# EAGLE board Circuit (EAGLE 5.00)
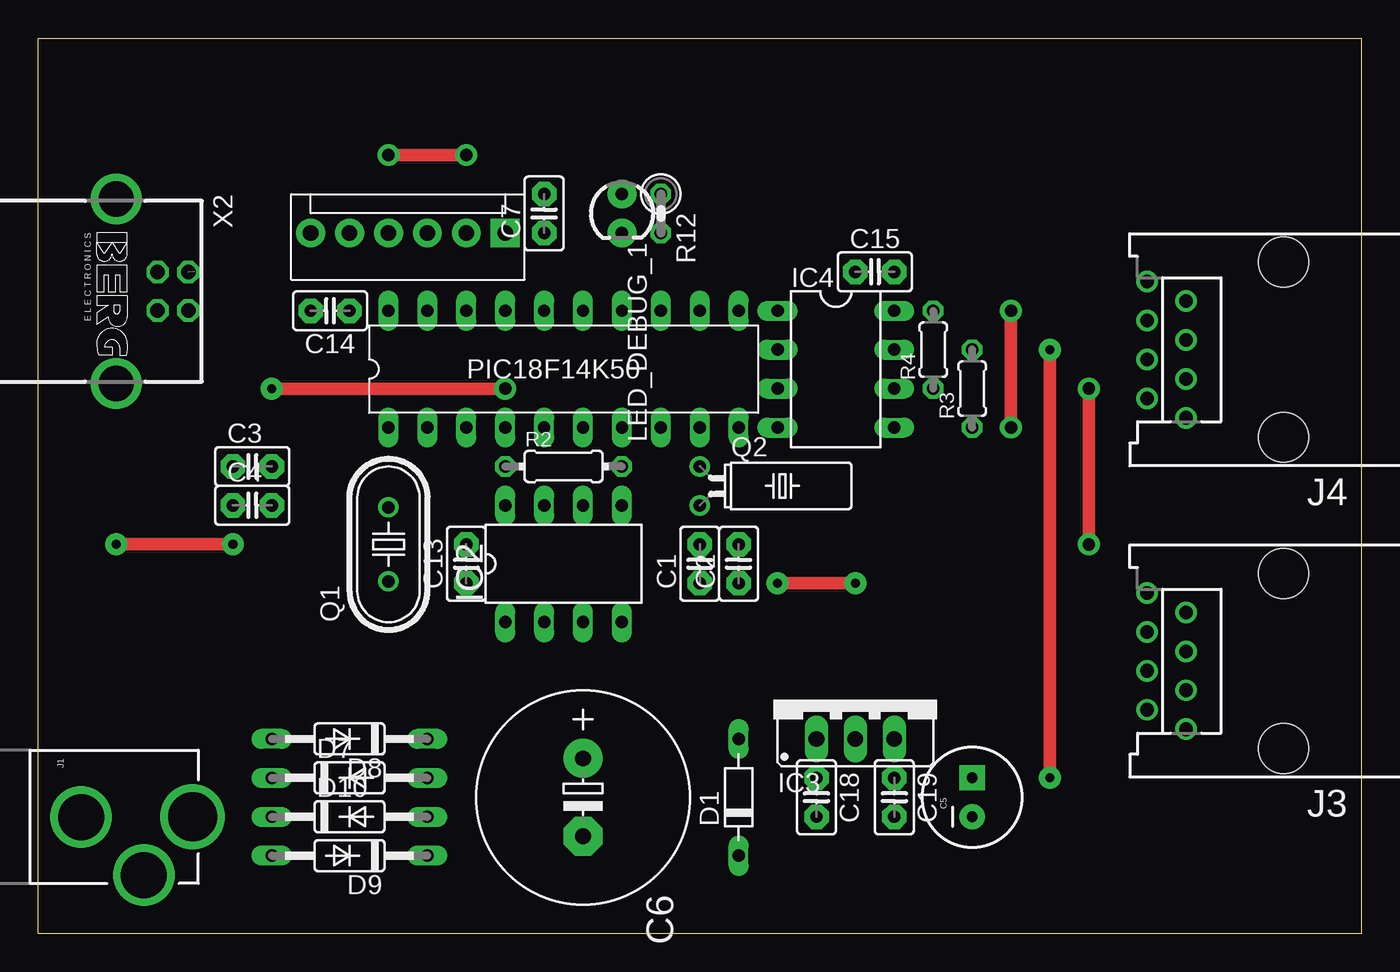
[diagram p0: board, top side]
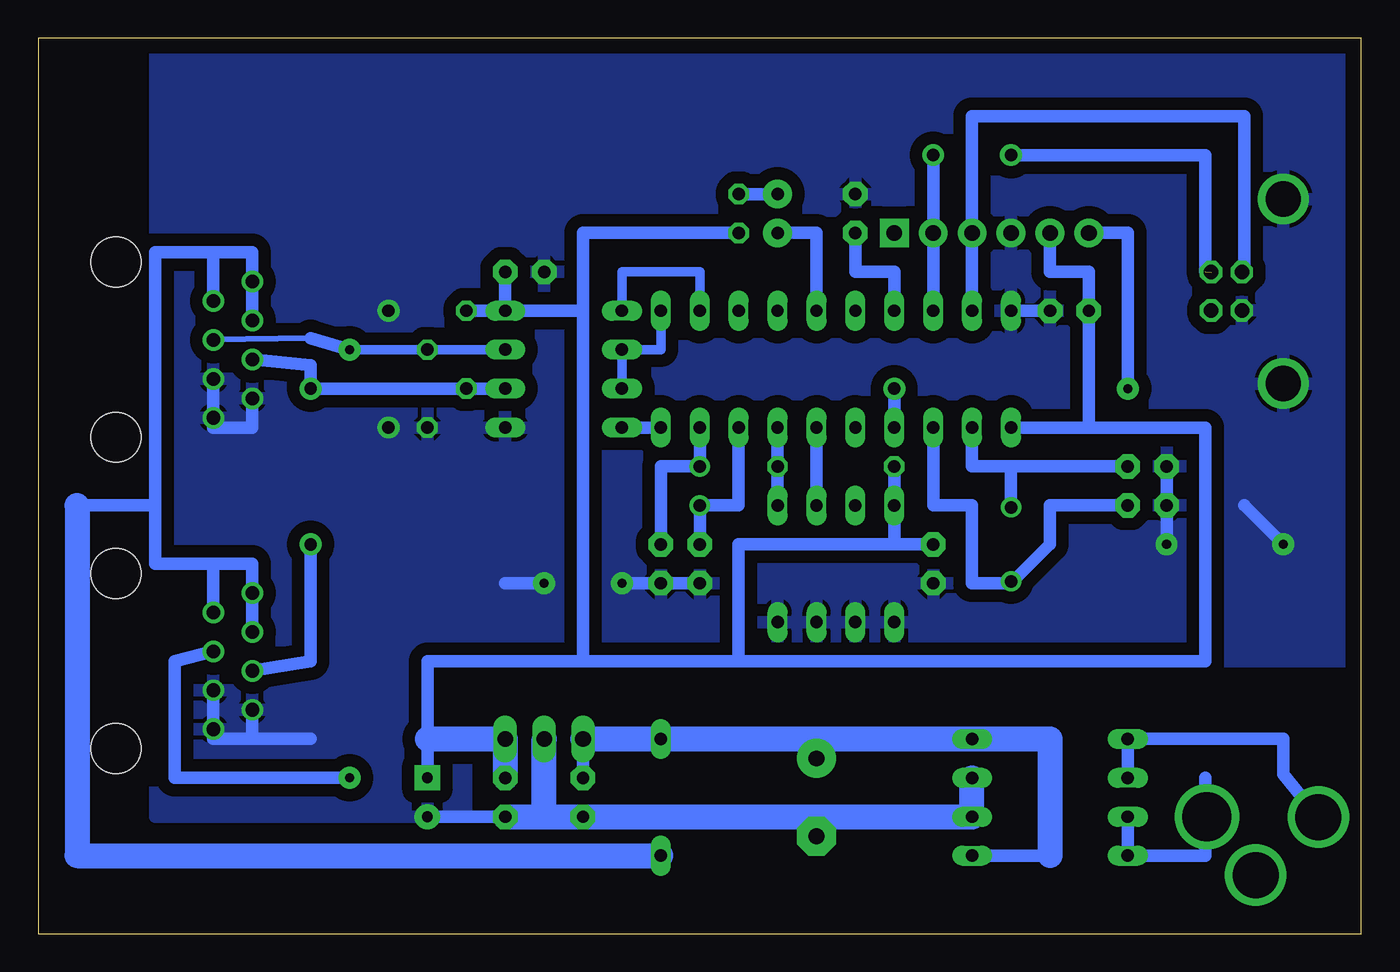
[diagram p1: board, bottom side, seen from below]

Size 86.36 x 58.42 mm. Coordinates in mm from the lower left corner, seen from the top.
Outline: 86.36,0 0,0 0,58.42 86.36,58.42 86.36,0
Copper layers (1*16): Top 0.035mm / dielectric 1.5mm / Bottom 0.035mm
Design rules "default": minimum track width 10mil, minimum drill 24mil, track to track 8mil, track to pad 8mil, pad to pad 8mil, via to via 8mil, smd to smd 8mil, copper to edge 40mil, drill to drill 8mil, minimum pad ring 10mil, minimum via ring 8mil, stop-mask expansion 4mil, vias tented up to drill 0mil, thermal gap 10mil

## Footprints (pad centres in the part's own frame; a part is rotated, then mirrored left to right if it is on the bottom)
C2.5-2 = drill 0.813 pad 1.6 octagon: 1 -1.27,0; 2 1.27,0
CPOL-RADIAL-100UF-25V = drill 0.7 pad 1.651 square: 1 1.27,0 | drill 0.7 pad 1.651 round: 2 -1.27,0
E5-13 = drill 1.016 pad 2.54 round: + -2.54,0 | drill 1.016 pad 2.54 octagon: - 2.54,0
D-7.5 = drill 0.813 long: A 3.81,0; C -3.81,0
DO35-10 = drill 0.813 long: A 5.08,0; C -5.08,0
DIL8 = drill 0.813 long: 1 -3.81,-3.81; 2 -1.27,-3.81; 3 1.27,-3.81; 4 3.81,-3.81; 5 3.81,3.81; 6 1.27,3.81; 7 -1.27,3.81; 8 -3.81,3.81
78XXS = drill 1.016 long: GND 0,-2.54; IN -2.54,-2.54; OUT 2.54,-2.54
DIL08 = drill 0.813 long: 1 -3.81,-3.81; 2 -1.27,-3.81; 3 1.27,-3.81; 4 3.81,-3.81; 5 3.81,3.81; 6 1.27,3.81; 7 -1.27,3.81; 8 -3.81,3.81
POWER_JACK_PTH_LOCK = drill 2.997 round: GND 0.025,6.608; GNDBREAK 3.812,10.7 | drill 3.2 round: PWR 0,13.878
215877-4 = drill 0.889 round: 1 -4.445,6.35; 2 -3.175,8.89; 3 -1.905,6.35; 4 -0.635,8.89; 5 0.635,6.35; 6 1.905,8.89; 7 3.175,6.35; 8 4.445,8.89 | hole 3.251: -5.715,0; 5.715,0
LED3MM = drill 0.813 pad 1.88 round: A -1.27,0; K 1.27,0
HC49U70 = drill 0.813 round: 1 -2.413,0; 2 2.413,0
TC38H = drill 0.813 round: 1 -1.27,0; 2 1.27,0
0204/7 = drill 0.813 octagon: 1 -3.81,0; 2 3.81,0
0204/5 = drill 0.813 octagon: 1 -2.54,0; 2 2.54,0
0207/2V = drill 0.813 octagon: 1 -1.27,0; 2 1.27,0
E.18F14K50 = drill 0.8 long: RA0/D+/PGD -7.62,3.81; RA1/D-/PGC -5.08,3.81; RA3/MCLR/VPP -2.54,-3.81; RA4/AN3/OSC2/CLKOUT -5.08,-3.81; RA5/OSC1/CLKIN -7.62,-3.81; RB4/AN10/SDI/SDA 7.62,3.81; RB5/AN11/RX/DT 10.16,3.81; RB6/SCK/SCL 12.7,3.81; RB7/TX/CK 12.7,-3.81; RC0/AN4/C12IN+/INT0/VREF+ 0,3.81; RC1/AN5/C12IN1-/INT1/VREF 2.54,3.81; RC2/AN6/P1D/C12IN2-/CVREF/INT2 5.08,3.81; RC3/AN7/P1C/C12IN3-/PGM 5.08,-3.81; RC4/P1B/C12OUT/SRQ 2.54,-3.81; RC5/CCP1/P1A/T0CKI 0,-3.81; RC6/AN8/SS/T13CKI/T1OSCI 7.62,-3.81; RC7/AN9/SDO/T1OSCO 10.16,-3.81; VDD -10.16,-3.81; VSS -10.16,3.81; VUSB -2.54,3.81
MOLEX-1X6 = drill 1.016 pad 1.88 square: 1 0,0 | drill 1.016 pad 1.88 round: 2 2.54,0; 3 5.08,0; 4 7.62,0; 5 10.16,0; 6 12.7,0
PN61729-S = drill 0.95 octagon: 1 1.25,4.71; 2 -1.25,4.71; 3 -1.25,2.71; 4 1.25,2.71 | drill 2.3 pad 2.9 round: S1 -6.02,0; S2 6.02,0

## Placement (x,y rotation side)
C1  22pf  [C2.5-2]  43.18,24.13 90 top
C2  22pf  [C2.5-2]  45.72,24.13 90 top
C3  22pf  [C2.5-2]  13.97,30.48 0 top
C4  22pf  [C2.5-2]  13.97,27.94 0 top
C5  10uf  [CPOL-RADIAL-100UF-25V]  60.96,8.89 90 top
C6  2200uf  [E5-13]  35.56,8.89 270 top
C7  100nf  [C2.5-2]  33.02,46.99 90 top
C13  10nf  [C2.5-2]  27.94,24.13 90 top
C14  10nf  [C2.5-2]  19.05,40.64 180 top
C15  10nf  [C2.5-2]  54.61,43.18 0 top
C18  100nf  [C2.5-2]  50.8,8.89 270 top
C19  100nf  [C2.5-2]  55.88,8.89 270 top
D1  [D-7.5]  45.72,8.89 90 top
D7  BA243A  [DO35-10]  20.32,10.16 0 top
D8  BA243A  [DO35-10]  20.32,12.7 180 top
D9  BA243A  [DO35-10]  20.32,5.08 180 top
D10  BA243A  [DO35-10]  20.32,7.62 0 top
IC2  24AA256P  [DIL8]  34.29,24.13 0 top
IC3  LM7805  [78XXS]  53.34,15.24 0 top
IC4  LTC485N  [DIL08]  52.07,36.83 270 top
J1  POWER_JACKPTH_LOCK  [POWER_JACK_PTH_LOCK]  -3.81,7.62 270 top
J3  OUT1  [215877-4]  81.28,17.78 90 top
J4  OUT2  [215877-4]  81.28,38.1 90 top
LED_DEBUG_1  RED  [LED3MM]  38.1,46.99 270 top
Q1  12Mhz  [HC49U70]  22.86,25.4 90 top
Q2  32.768Khz  [TC38H]  43.18,29.21 270 top
R2  4k7  [0204/7]  34.29,30.48 0 top
R3  10k  [0204/5]  60.96,35.56 90 top
R4  10k  [0204/5]  58.42,38.1 90 top
R12  330  [0207/2V]  40.64,46.99 270 top
U$1  D.2.18F14K50  [E.18F14K50]  33.02,36.83 0 top
U$9  PIC-ICSPPTH  [MOLEX-1X6]  30.48,45.72 180 top
X2  PN61729-S  [PN61729-S]  5.08,41.91 270 top

## Library data of the parts
C1-C4 C7 C13-C15 C18 C19 = capacitor-wima
C5 J1 LED_DEBUG_1 U$9 = SparkFun
C6 = rcl
D1 D7-D10 = diode
IC2 = microchip
IC3 = v-reg
IC4 = linear-technology
J3 J4 = con-amp
Q1 Q2 = crystal
R2-R4 R12 = resistor
U$1 = pic18f14k50
X2 = con-berg

## Nets
3.3V: C7.1 U$1.VUSB
5V: C5.1 C13.2 C14.2 C15.2 C19.1 IC2.8 IC3.OUT IC4.8 R2.1 R4.2 R12.2 U$1.VDD U$9.5
12V: C6.+ C18.1 D1.A D8.C D9.C IC3.IN
GND: C1.1 C2.1 C3.1 C4.1 C5.2 C6.- C7.2 C13.1 C14.1 C15.1 C18.2 C19.2 D7.A D10.A IC2.1 IC2.2 IC2.3 IC2.4 IC3.GND IC4.5 J3.1 J3.2 J3.3 J4.1 J4.2 J4.3 R3.1 U$1.VSS U$9.4 X2.4 X2.S1 X2.S2
N$1: IC2.6 U$1.RC4/P1B/C12OUT/SRQ
N$4: D7.C D8.A J1.GND
N$5: IC4.1 U$1.RB5/AN11/RX/DT
N$6: IC4.6 J3.4 J4.4 R4.1
N$7: IC4.2 IC4.3 U$1.RB6/SCK/SCL
N$8: D9.A D10.C J1.PWR
N$9: C1.2 Q2.2 U$1.RC6/AN8/SS/T13CKI/T1OSCI
N$10: C2.2 Q2.1 U$1.RC7/AN9/SDO/T1OSCO
N$12: IC2.5 R2.2 U$1.RC3/AN7/P1C/C12IN3-/PGM
N$13: IC4.7 J3.5 J4.5 R3.2
N$14: C4.2 Q1.1 U$1.RA4/AN3/OSC2/CLKOUT
N$15: C3.2 Q1.2 U$1.RA5/OSC1/CLKIN
N$19: D1.C J3.6 J3.7 J3.8 J4.6 J4.7 J4.8
N$28: U$1.RA3/MCLR/VPP U$9.6
N$38: U$1.RA0/D+/PGD U$9.3 X2.3
N$39: U$1.RA1/D-/PGC U$9.2 X2.2
N$41: IC4.4 U$1.RB7/TX/CK
N$66: LED_DEBUG_1.A R12.1
N$67: LED_DEBUG_1.K U$1.RC1/AN5/C12IN1-/INT1/VREF

## Tracks (layer width: path | path; a pad name or v marks a point on that pad's centre or on a via)
3.3V
  Bottom 0.813: U$1.VUSB 30.48,43.18 33.02,43.18 C7.1
5V
  Bottom 0.813: 30.48,25.4 IC2.8 R2.1 30.48,25.4 | 30.48,25.4 C13.2 | IC4.8 R4.2 | IC4.8 C15.2 | 30.48,25.4 40.64,25.4 40.64,17.78 | 50.8,17.78 40.64,17.78 | 50.8,40.64 50.8,17.78 | 50.8,40.64 IC4.8 | R12.2 50.8,45.72 | 50.8,45.72 50.8,40.64 | 50.8,45.72 50.8,17.78 | 50.8,17.78 60.96,17.78 60.96,12.7 C5.1 | 17.78,33.02 10.16,33.02 10.16,17.78 40.64,17.78 | 17.78,33.02 U$1.VDD | U$9.5 20.32,43.18 17.78,43.18 C14.2 17.78,33.02 | IC3.OUT C19.1 IC3.OUT
  Bottom 1.626: C19.1 IC3.OUT 60.96,12.7
12V
  Bottom 0.813: 20.32,5.08 D9.C | IC3.IN C18.1 | 35.56,12.7 C6.+
  Bottom 1.626: 20.32,5.08 20.32,12.7 D8.C 35.56,12.7 D1.A IC3.IN
GND  (via drill 0.6 pad 1.42, 0.81 pad 1.42)
  Top 0.813: v53.34,22.86 v48.26,22.86 | v12.7,25.4 v5.08,25.4 | v63.5,33.02 v63.5,40.64
  Bottom 0.813: U$1.VSS C14.1 | v48.26,22.86 C1.1 | 55.88,22.86 v53.34,22.86 | C3.1 v12.7,25.4 | v5.08,25.4 7.62,27.94 | J3.3 J3.1 74.93,12.7 72.39,12.7 | J3.2 72.39,12.7 | 72.39,12.7 68.58,12.7 | J4.2 72.39,33.02 74.93,33.02 J4.1 J4.3 | 35.56,7.62 C6.- | C5.2 C19.2
  Bottom 1.626: D7.A D10.A 35.56,7.62 53.34,7.62 | 53.34,7.62 C18.2 | C19.2 53.34,7.62 | 53.34,7.62 IC3.GND
  pour Bottom (isolate 0.813): 78.74,58.42 78.74,7.62 58.42,7.62 58.42,17.78 0,17.78 0,58.42
N$1
  Bottom 0.813: U$1.RC4/P1B/C12OUT/SRQ IC2.6
N$4
  Bottom 0.813: D7.C D8.A 5.08,12.7 5.08,10.39 J1.GND
N$5
  Bottom 0.61: U$1.RB5/AN11/RX/DT 43.18,43.18 48.26,43.18 IC4.1
N$6  (via drill 0.81 pad 1.42)
  Top 0.813: v68.58,25.4 v68.58,35.56
  Bottom 0.813: IC4.6 R4.1 v68.58,35.56 68.58,37.08 J4.4 | J3.4 68.58,17.78 v68.58,25.4
N$7
  Bottom 0.61: IC4.3 IC4.2 45.72,38.1 U$1.RB6/SCK/SCL
N$8
  Bottom 0.813: D10.C D9.A 10.16,5.08 10.16,10.16 J1.PWR
N$9
  Bottom 0.813: U$1.RC6/AN8/SS/T13CKI/T1OSCI 40.64,27.94 Q2.2 C1.2
N$10
  Bottom 0.813: U$1.RC7/AN9/SDO/T1OSCO Q2.1 45.72,30.48 C2.2
N$12
  Bottom 0.813: IC2.5 R2.2 U$1.RC3/AN7/P1C/C12IN3-/PGM
N$13  (via drill 0.6 pad 1.42)
  Top 0.813: v66.04,10.16 v66.04,38.1
  Bottom 0.406: 68.58,38.86 J4.5
  Bottom 0.61: IC4.7 R3.2 v66.04,38.1
  Bottom 0.813: J3.5 77.47,17.78 77.47,10.16 v66.04,10.16 | v66.04,38.1 68.58,38.86
N$14
  Bottom 0.813: U$1.RA4/AN3/OSC2/CLKOUT 27.94,27.94 25.4,27.94 25.4,22.86 22.86,22.86 | 22.86,22.86 Q1.1 | 22.86,22.86 20.32,25.4 20.32,27.94 C4.2
N$15
  Bottom 0.813: 22.86,30.48 C3.2 | 22.86,30.48 25.4,30.48 U$1.RA5/OSC1/CLKIN | 22.86,30.48 Q1.2
N$19
  Bottom 0.813: 74.93,24.13 78.74,24.13 78.74,27.94 | 78.74,27.94 78.74,44.45 | 74.93,24.13 72.39,24.13 J3.8 | 74.93,24.13 J3.7 | 78.74,44.45 74.93,44.45 J4.7 | 72.39,43.18 72.39,44.45 78.74,44.45 | 72.39,43.18 J4.8 | J3.6 J3.8 | J3.8 72.39,22.86 | 72.39,43.18 J4.6 | 78.74,27.94 83.82,27.94
  Bottom 1.626: D1.C 83.82,5.08 83.82,27.94
N$28  (via drill 0.6 pad 1.42, 0.81 pad 1.42)
  Top 0.813: v30.48,35.56 v15.24,35.56
  Bottom 0.813: v30.48,35.56 U$1.RA3/MCLR/VPP | v15.24,35.56 15.24,45.72 U$9.6
N$38
  Bottom 0.813: U$1.RA0/D+/PGD U$9.3 25.4,53.34 7.62,53.34 7.62,43.18 X2.3
N$39  (via drill 0.81 pad 1.42)  (1 unrouted)
  Top 0.813: v27.94,50.8 v22.86,50.8
  Bottom 0.406: v27.94,50.8 U$9.2
  Bottom 0.813: U$1.RA1/D-/PGC U$9.2 v27.94,50.8 | 10.16,43.18 10.16,50.8 v22.86,50.8
N$41
  Bottom 0.813: IC4.4 U$1.RB7/TX/CK
N$66
  Bottom 0.813: LED_DEBUG_1.A R12.1
N$67
  Bottom 0.813: U$1.RC1/AN5/C12IN1-/INT1/VREF 35.56,45.72 LED_DEBUG_1.K